# Altium PCB PCB1.PcbDoc
Units mm, origin at the board's own origin, x right, y up, seen from the top; angles counter-clockwise.
Board outline 38.3 x 26.8 mm, 2 copper layers (Top Layer, Bottom Layer); 21 components, 18 nets, 56 pads, 0 vias.
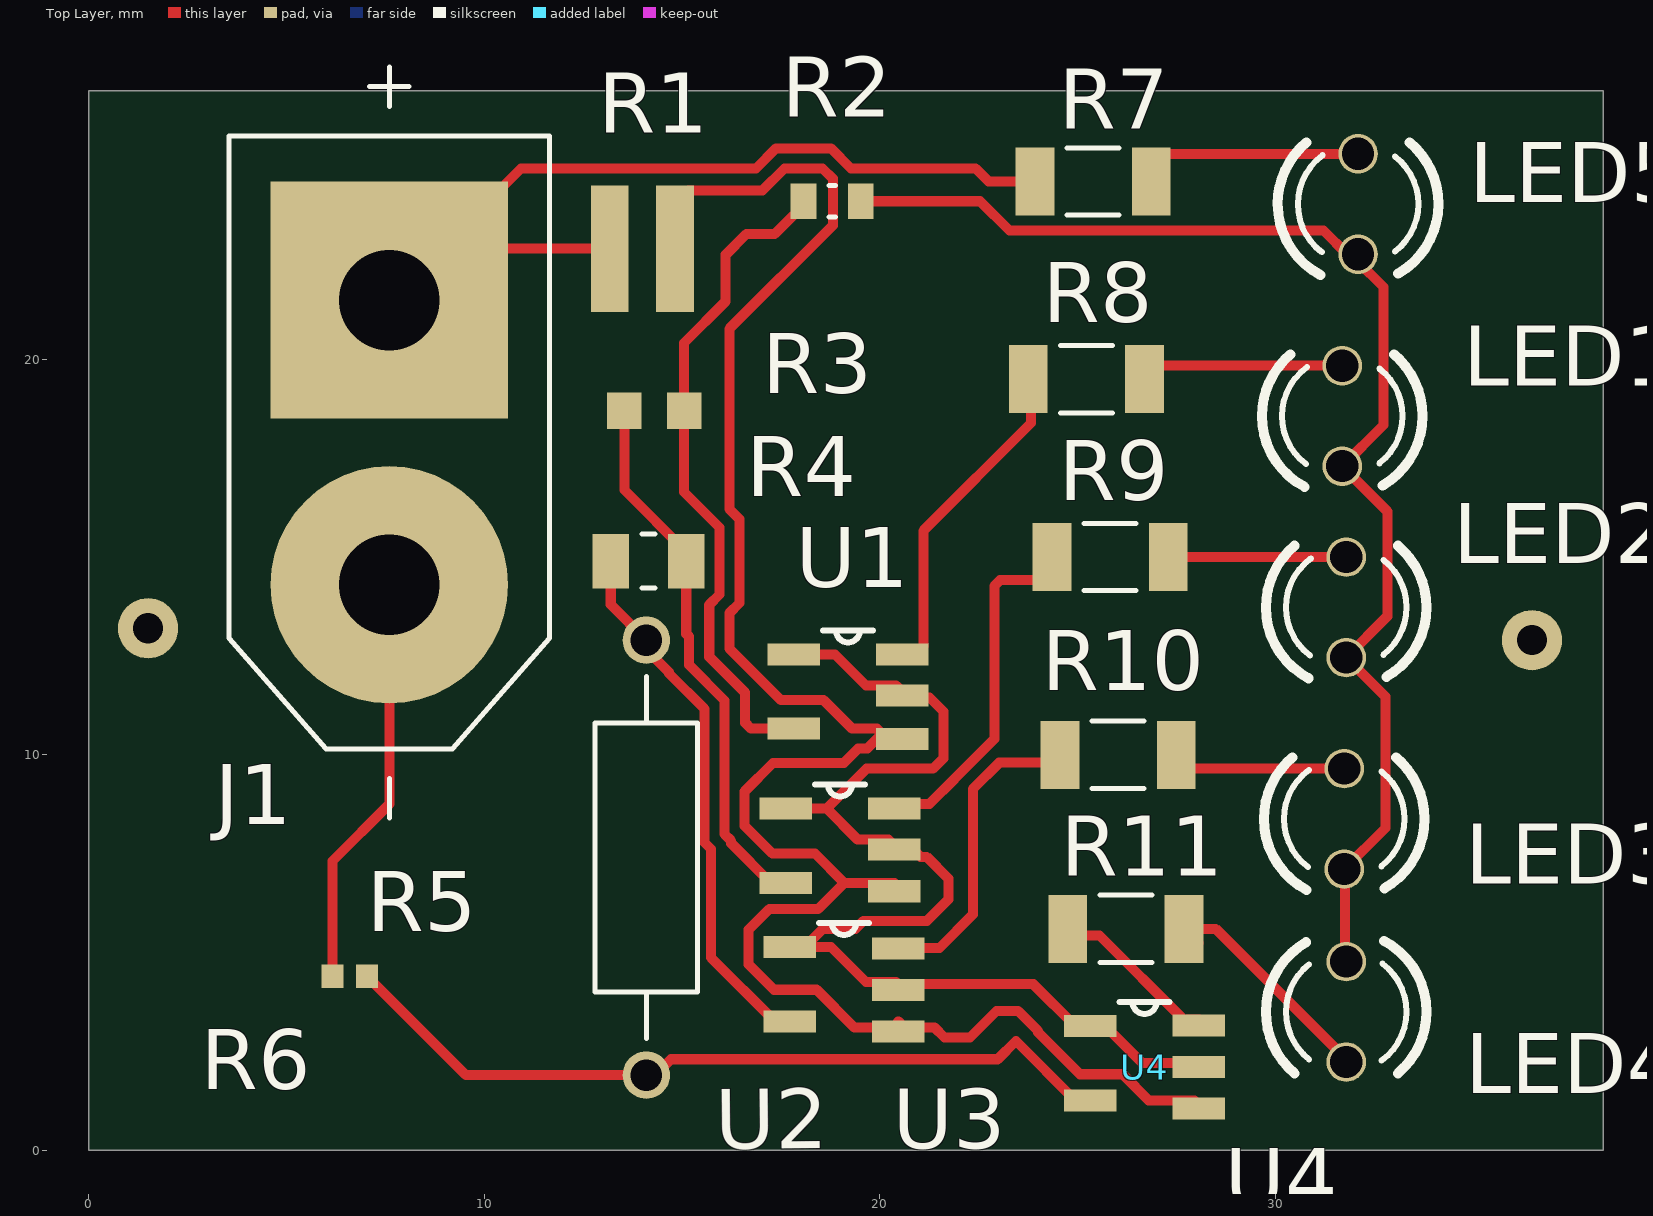
[diagram p0: Top Layer view]
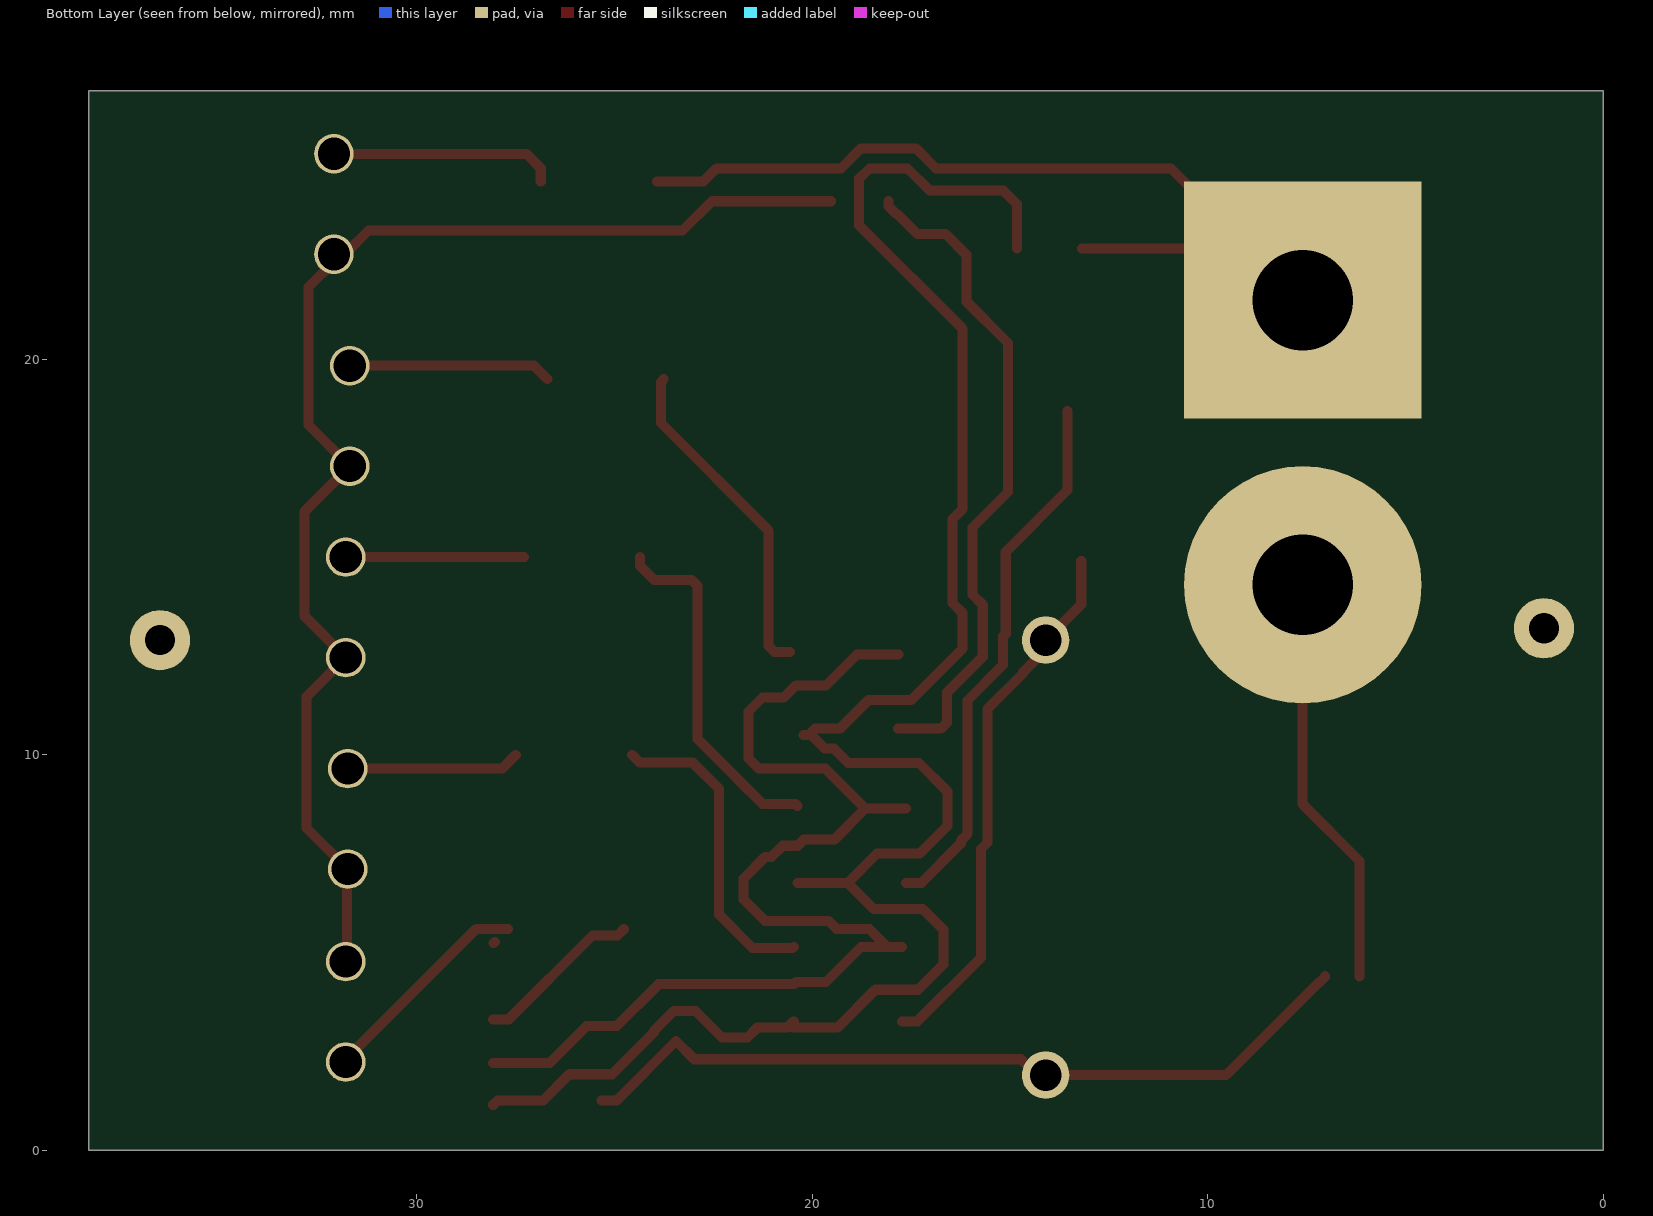
[diagram p1: Bottom Layer view, seen from below]
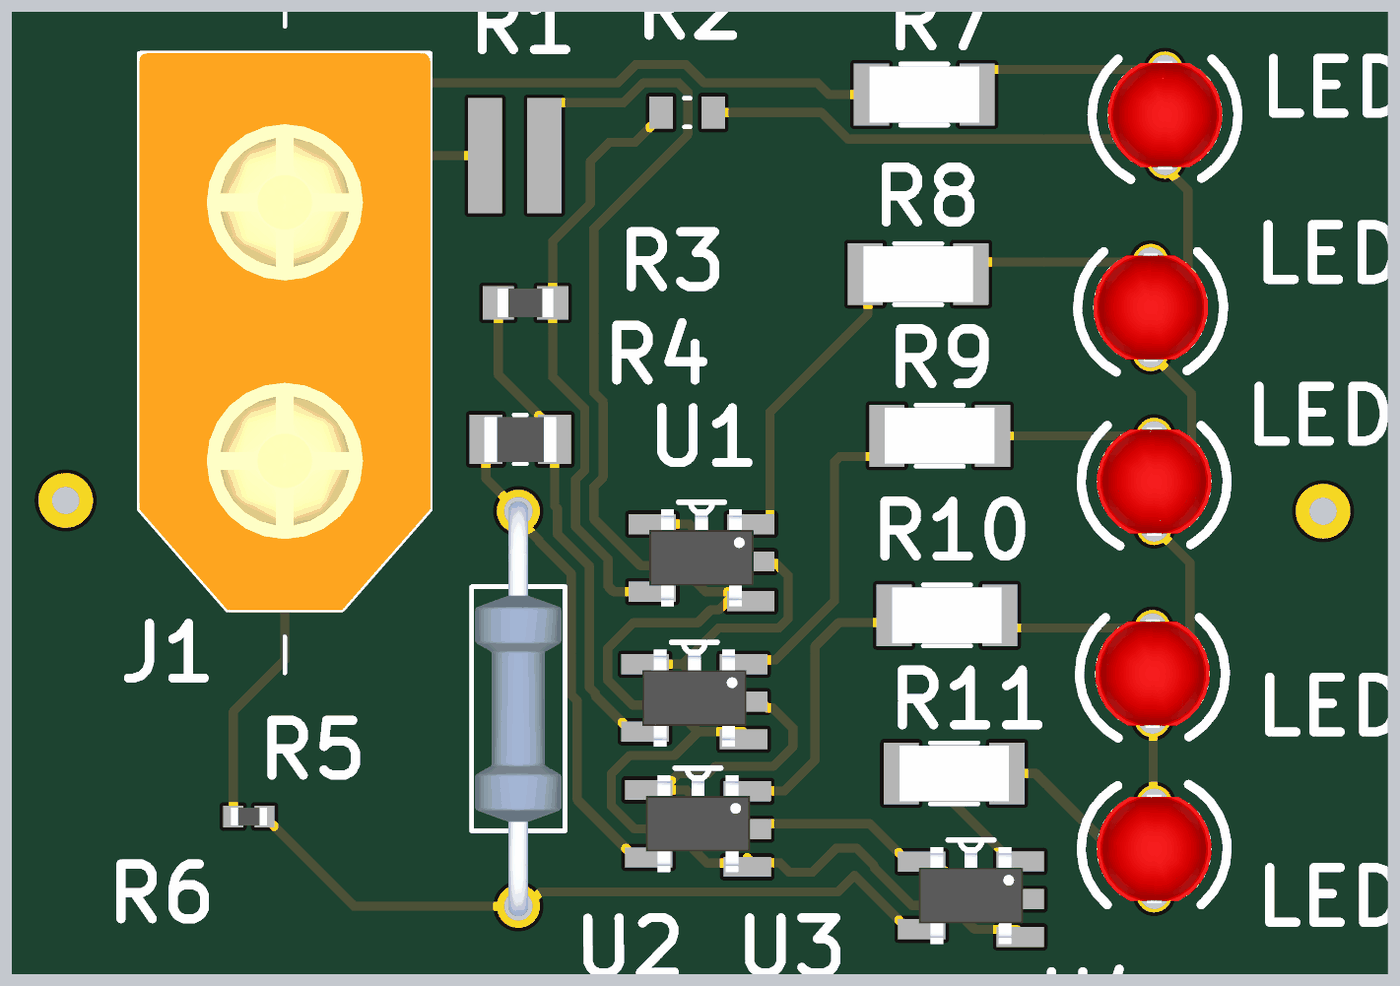
[diagram p2: 3D render of the assembled board from above, using the file's embedded part models]

## Layer stack, top to bottom
Top Solder: solder mask 0.0102, Solder Resist, Dk 3.5
Top Layer: signal copper 0.0356
Dielectric 1: dielectric 0.32, FR-4, Dk 4.8
Bottom Layer: signal copper 0.0356
Bottom Solder: solder mask 0.0102, Solder Resist, Dk 3.5

## Board outline
0,0 0,26.8 38.3,26.8 38.3,0

## Design rules (kind name [scope] priority, off if disabled: settings)
Clearance [All] p1: gap=0.254 ignorepadtopadclearanceinfootprint=FALSE
PolygonConnect [All] p1: connectstyle=Relief reliefconductorwidth=0.254 reliefentries=4 polygonreliefangle="90 Angle" airgapwidth=0.254
RoutingVias [All] p1: holewidth=0.711 width=1.27 viastyle="Through Hole" minholewidth=0.711 minwidth=1.27 maxholewidth=0.711 maxwidth=1.27
SolderMaskExpansion [All] p1: expansion=0.102 istentingtop=FALSE
SupplyNets "Schematic Supply Nets" [InNet('GND')] p1: voltage=0.000
SupplyNets "Schematic Supply Nets_1" [InNet('VCC')] p2: voltage=0.000
Width [All] p1: maxlimit=0.254 minlimit=0.254 preferedwidth=0.254
30 further rules are at their usual default settings.

## Components (designator, comment, footprint, x,y, rotation, side; value= is the part's Value field where it differs from the comment)
J1 "XT60-M" AMASS_XT60-M 7.6,17.9 r270 top (schematic designator J?)
LED1 "TLLR4400" LED3MM 31.7,18.57 r90 top
LED2 "TLLR4400" LED3MM 31.8,13.73 r90 top
LED3 "TLLR4400" LED3MM 31.75,8.38 r90 top
LED4 "TLLR4400" LED3MM 31.8,3.5 r270 top
LED5 "TLLR4400" LED3MM 32.1,23.93 r90 top
R1 "ERJB2AF432V" RES_ERJB2AF432V 14,22.8 r0 top
R2 "ERA3APB183V" RES_ERA3APB183V 18.8,24 r0 top value=18k
R3 "CPF0603B680KE1" RESC1508X55N 14.3,18.7 r0 top
R4 "RC0805FR-07536RL" RESC2012X60N 14.155,14.9 r0 top
R5 "MFR-25FRF52-576R" RESAD1100W55L680D260 14.1,7.4 r90 top
R6 "CRG0402J10K/10" RESC1005X40N 6.6,4.4 r0 top
R7 "RP73D2B1K0BTG" RESC3015X65N 25.4,24.5 r0 top
R8 "RP73D2B1K0BTG" RESC3015X65N 25.23,19.5 r0 top
R9 "RP73D2B1K0BTG" RESC3015X65N 25.83,15 r0 top
R10 "RP73D2B1K0BTG" RESC3015X65N 26.03,10 r0 top
R11 "RP73D2B1K0BTG" RESC3015X65N 26.23,5.6 r0 top
U1 "MCP6401T-E/OT" SOT95P270X145-5N#1 19.2,11.6 r180 top
U2 "MCP6401T-E/OT" SOT95P270X145-5N#2 19,7.7 r180 top
U3 "MCP6401T-E/OT" SOT95P270X145-5N#3 19.1,4.2 r180 top
U4 "MCP6401T-E/OT" SOT95P270X145-5N#4 26.7,2.2 r180 top

## Footprints (in the part's own frame and the unit in brackets; to place one, negate y for a bottom-side part, rotate by r counter-clockwise, add the part's x,y. Pads: shape width x height; smd on the part's side, far side on the other; paste and mask are expansions set on the pad)
AMASS_XT60-M [mm]
  round 6 hole 2.54: N(3.6,0)
  rect 6x6 / inner round 6 / far side rect 6x6 hole 2.54: P(-3.6,0)
  silkscreen extent -9.5,-4.05 9.5,4.05, body extent -7.75,-4.05 7.75,4.05, height 16
LED3MM [mm]
  round 1 hole 0.813: A(-1.27,0) K(1.27,0)
  silkscreen extent -1.79,-2.03 1.56,2.03, body extent -1.52,-1.59 1.52,1.59, height 6.1
RES_ERA3APB183V [mm]
  rect 0.65x0.9 smd: 1(-0.725,0) 2(0.725,0)
  silkscreen extent -0.08,-0.4 0.08,0.4
RES_ERJB2AF432V [mm]
  rect 0.95x3.2 smd: 1(-0.825,0) 2(0.825,0)
RESAD1100W55L680D260 [mm]
  round 1.2 hole 0.8: 1(-5.5,0) 2(5.5,0)
  silkscreen extent -4.58,-1.3 4.58,1.3, body extent -5.77,-1.2 5.77,1.2, height 2.4
RESC1005X40N [mm]
  rect 0.56x0.6 smd: 1(-0.435,0) 2(0.435,0)
  body extent -0.5,-0.25 0.5,0.25, height 0.37
RESC1508X55N [mm]
  rect 0.87x0.93 smd: 1(-0.755,0) 2(0.755,0)
  body extent -0.77,-0.4 0.77,0.4, height 0.55
RESC2012X60N [mm]
  rect 0.92x1.38 smd: 1(-0.955,0) 2(0.955,0)
  silkscreen extent -0.17,-0.68 0.17,0.68, body extent -1,-0.63 1,0.63, height 0.6
RESC3015X65N [mm]
  rect 0.98x1.72 smd: 1(-1.47,0) 2(1.47,0)
  silkscreen extent -0.66,-0.85 0.66,0.85, body extent -1.53,-0.77 1.53,0.77, height 0.65
SOT95P270X145-5N#1 [mil]
  rect 52x22 smd: 1(-54,-37.01) 2(-54,3.94) 3(-54,47.24) 4(54,37) 5(54,-37)
  silkscreen extent -25,-61 25,-49, body extent -57,-53 57,53, height 57
SOT95P270X145-5N#2 [mil]
  rect 52x22 smd: 1(-54,-37.01) 2(-54,3.94) 3(-54,45.28) 4(54,37) 5(54,-37)
  silkscreen extent -25,-61 25,-49, body extent -57,-53 57,53, height 57
SOT95P270X145-5N#3 [mil]
  rect 52x22 smd: 1(-54,-35.43) 2(-54,5.91) 3(-54,47.24) 4(54,37) 5(54,-37)
  silkscreen extent -25,-61 25,-49, body extent -57,-53 57,53, height 57
SOT95P270X145-5N#4 [mil]
  rect 52x22 smd: 1(-54,-37.4) 2(-54,3.94) 3(-54,45.28) 4(54,37) 5(54,-37)
  silkscreen extent -25,-61 25,-49, body extent -57,-53 57,53, height 57

## Part data
J1: "Plug; DC supply; XT60; male; PIN: 2; for cable; soldered; 30A; 500V", Package=Package, Check_prices=https://www.snapeda.com/parts/XT60-M/AMASS/view-part/?ref=eda, MF=AMASS, MP=XT60-M, SnapEDA_Link=https://www.snapeda.com/parts/XT60-M/AMASS/view-part/?ref=snap
LED1 LED2 LED3 LED4 LED5: "Red 619nm LED Indication - Discrete 1.9V Radial", Package=None, Check_prices=https://www.snapeda.com/parts/TLLR4400/Vishay+Semiconductor+Opto+Division/view-part/?ref=eda, MF=Vishay, MP=TLLR4400, SnapEDA_Link=https://www.snapeda.com/parts/TLLR4400/Vishay+Semiconductor+Opto+Division/view-part/?ref=snap
R1 R2: Package=None, Availability=Unavailable, Price=None
  R1: MP=ERJB2AF432V
  R2: MP=ERA3APB183V
R3: "680 kOhms Â±0.1% 0.063W, 1/16W Chip Resistor 0603 (1608 Metric) Thin Film", Package=0603, Power_Rating=".063 W", Resistance=750K, Tolerance=.1%, Voltage_Rating="50 V", Check_prices=https://www.snapeda.com/parts/CPF0603B680KE1/TE+Connectivity/view-part/?ref=eda, EU_RoHS_Compliance=Compliant, MF="TE Connectivity", MP=CPF0603B680KE1, SnapEDA_Link=https://www.snapeda.com/parts/CPF0603B680KE1/TE+Connectivity/view-part/?ref=snap
R4: "536 Ohms Â±1% 0.125W, 1/8W Chip Resistor 0805 (2012 Metric) Moisture Resistant Thick Film", Package="2012 Yageo", Check_prices=https://www.snapeda.com/parts/RC0805FR-07536RL/Yageo/view-part/?ref=eda, MF=Yageo, MP=RC0805FR-07536RL, SnapEDA_Link=https://www.snapeda.com/parts/RC0805FR-07536RL/Yageo/view-part/?ref=snap
R5: "576 Ohms Â±1% 0.25W, 1/4W Through Hole Resistor Axial - Metal Film", Package="RADIAL-2 YAGEO", Check_prices=https://www.snapeda.com/parts/MFR-25FRF52-576R/Yageo/view-part/?ref=eda, MF=Yageo, MP=MFR-25FRF52-576R, SnapEDA_Link=https://www.snapeda.com/parts/MFR-25FRF52-576R/Yageo/view-part/?ref=snap
R6: "CRG0402 chip resistor,10K 5% 0.063W", Package=0402, Power_Rating=".063 W", Resistance=10K, Tolerance=5%, Voltage_Rating="50 V", Check_prices=https://www.snapeda.com/parts/CRG0402J10K/10/TE+Connectivity+Passive+Product/view-part/?ref=eda, EU_RoHS_Compliance="Compliant with Exemptions", MF="TE Connectivity", MP=CRG0402J10K/10, SnapEDA_Link=https://www.snapeda.com/parts/CRG0402J10K/10/TE+Connectivity+Passive+Product/view-part/?ref=snap
R7 R8 R9 R10 R11: "Res Thin Film 1206 1K Ohm 0.1% 0.25W(1/4W) Â±15ppm/C Epoxy Pad SMD Medical T/R", Package=1206, Power_Rating=".25 W", Resistance=1K, Tolerance=.1%, Voltage_Rating="200 V", Check_prices=https://www.snapeda.com/parts/RP73D2B1K0BTG/TE+Connectivity/view-part/?ref=eda, EU_RoHS_Compliance=Compliant, MF="TE Connectivity", MP=RP73D2B1K0BTG, SnapEDA_Link=https://www.snapeda.com/parts/RP73D2B1K0BTG/TE+Connectivity/view-part/?ref=snap
U1 U2 U3 U4: "General Purpose Amplifier 1 Circuit Rail-to-Rail SOT-23-5", Package="SOT-23-5 Microchip", Check_prices=https://www.snapeda.com/parts/MCP6401T-E/OT/Microchip/view-part/345712/?ref=eda, Digi-Key_Part_Number=MCP6401T-E/OTCT-ND, MF=Microchip, MP=MCP6401T-E/OT, SnapEDA_Link=https://www.snapeda.com/parts/MCP6401T-E/OT/Microchip/view-part/345712/?ref=snap

## Free pads (board coordinates)
  round 1.524 hole 0.762: 3(1.5,13.2) 4(36.5,12.9)

## Nets (pads, with @x,y where several pads share a name; then routed paths per layer and width w, separated by ;. In a path a pad name is that pad's centre, name@x,y a point inside that pad or via, vN(x,y) a via of type N, cw(c..) or ccw(c..) an arc to the next point about the centre after c; other vN are vias at no path point)
GND: U1.2 U1.5 U2.2 U2.5 U3.2 U3.5 U4.2 U4.5 | length 30.1
  Top Layer w0.254: U2.5 18.66,8.64 ; U3.5 U3.5@18.109,5.14 ; U1.5 18.87,12.54 19.657,11.752 20.419,11.752 20.724,11.448 21.263,11.448 21.613,11.097 21.613,9.913 21.35,9.65 19.67,9.65 18.66,8.64 ; U4.2@28.072,2.2 26.649,2.2 25.709,3.14 U4.5 24.947,3.14 23.887,4.2 20.472,4.2 20.419,4.252 19.657,4.252 18.77,5.14 U3.5@18.109,5.14 ; U3.5@18.109,5.14 18.561,5.592 19.385,5.592 19.593,5.8 21.2,5.8 21.745,6.345 21.745,6.865 21.19,7.421 21.032,7.421 20.753,7.7 20.372,7.7 20.219,7.852 19.448,7.852 18.66,8.64
NetJ?_N: J1.N R6.1 | length 10.5
  Top Layer w0.254: R6.1 6.165,7.315 7.6,8.75 J1.N
NetJ?_P: J1.P R1.1 R7.1 | length 22.5
  Top Layer w0.254: J1.P J1.P@8.9,22.8 ; R1.1 J1.P@8.9,22.8 ; R7.1 22.76,24.5 22.429,24.831 19.276,24.831 18.768,25.339 17.382,25.339 16.874,24.831 10.931,24.831 J1.P@8.9,22.8
NetLED1_K: LED1.K R8.2 | length 5.1
  Top Layer w0.254: R8.2 27.04,19.84 LED1.K
NetLED2_K: LED2.K R9.2 | length 4.5
  Top Layer w0.254: R9.2 LED2.K
NetLED3_K: LED3.K R10.2 | length 4.4
  Top Layer w0.254: R10.2 27.85,9.65 LED3.K
NetLED4_K: LED4.K R11.2 | length 5.6
  Top Layer w0.254: R11.2 28.5,5.6 31.8,2.3 LED4.K ; R11.2@28.03,5.27 R11.2@28.063,5.237
NetLED5_K: LED5.K R7.2 | length 5.7
  Top Layer w0.254: R7.2 26.87,24.837 27.233,25.2 LED5.K
NetR1_2: R1.2 U1.3 U2.3 U3.3 U4.3 | length 50.3
  Top Layer w0.254: R1.2 14.825,23.925 15.173,24.273 17.034,24.273 17.592,24.831 18.558,24.831 18.819,24.57 18.819,23.392 16.2,20.773 16.2,16.217 16.459,15.958 16.459,13.842 16.2,13.583 16.2,12.69 17.508,11.381 18.586,11.381 19.307,10.66 19.93,10.66 20.088,10.503 U1.3@20.224,10.503 ; U1.3@20.061,10.53 19.688,10.158 19.46,10.158 19.094,9.792 17.302,9.792 16.587,9.077 16.587,8.203 17.288,7.502 18.365,7.502 19.107,6.76 ; U2.3@20.372,6.76 19.107,6.76 ; U3.3@20.472,3.1 19.367,3.1 18.41,4.058 17.332,4.058 16.687,4.703 16.687,5.577 17.21,6.1 18.447,6.1 19.107,6.76 ; U3.3@20.472,3.26 20.624,3.108 21.384,3.108 21.643,2.849 22.284,2.849 22.956,3.521 23.505,3.521 24.008,3.018 24.008,2.982 25.069,1.921 26.147,1.921 26.807,1.26 27.961,1.26 U4.3@28.072,1.15
NetR2_1: R2.1 R3.2 U1.4 | length 17
  Top Layer w0.254: U1.4 16.749,10.66 16.6,10.809 16.6,11.571 15.692,12.479 15.692,13.793 15.951,14.052 15.951,15.748 15.055,16.644 R3.2 15.055,20.416 16.107,21.469 16.107,22.648 16.628,23.168 17.347,23.168 17.855,23.677 17.877,23.677 18.075,23.875 R2.1
NetR3_1: R3.1 R4.2 U2.4 | length 13.9
  Top Layer w0.254: R3.1 13.545,16.695 15.11,15.13 15.11,13.061 15.184,12.987 15.184,12.269 16.079,11.374 16.079,7.992 16.246,7.825 16.246,7.762 17.247,6.76 U2.4
NetR4_1: R4.1 R5.2 U3.4 | length 13.7
  Top Layer w0.254: R4.1 13.2,13.8 R5.2 14.1,12.665 14.676,12.089 14.676,12.058 15.571,11.163 15.571,7.782 15.738,7.615 15.738,4.87 17.347,3.26 U3.4
NetR5_1: R5.1 R6.2 U4.4 | length 20.3
  Top Layer w0.254: R6.2 7.035,4.38 7.188,4.227 7.208,4.227 9.535,1.9 14.322,1.9 14.722,2.3 22.987,2.3 23.447,2.76 24.947,1.26 U4.4
NetR8_1: R8.1 U1.1 | length 8.5
  Top Layer w0.254: U1.1@20.572,12.6 20.953,12.6 21.105,12.752 21.105,15.664 23.83,18.389 23.83,19.43 R8.1
NetR9_1: R9.1 U2.1 | length 9
  Top Layer w0.254: U2.1@20.372,8.7 20.431,8.76 21.264,8.76 21.9,9.396 21.9,9.4 22.9,10.4 22.9,14.272 23.049,14.421 23.997,14.421 24.36,14.784 R9.1
NetR10_1: R10.1 U3.1 | length 8
  Top Layer w0.254: U3.1@20.472,5.14 20.498,5.113 21.513,5.113 22.358,5.958 22.358,9.135 23.025,9.802 24.362,9.802 R10.1
NetR11_1: R11.1 U4.1 | length 4.3
  Top Layer w0.254: R11.1 24.929,5.431 25.56,5.431 27.691,3.3 U4.1@28.072,3.3
VCC: LED1.A LED2.A LED3.A LED4.A LED5.A R2.2 | length 33.5
  Top Layer w0.254: R2.2 22.541,24 23.282,23.259 31.226,23.259 31.825,22.66 LED5.A 32.1,22.47 32.741,21.829 32.741,18.341 LED1.A 32.841,16.159 32.841,13.501 LED2.A 32.791,11.469 32.791,8.151 LED3.A 31.775,7.085 31.775,4.795 LED4.A

## Silkscreen, mask and mechanical layers (free items; w line width, h text height)
Mechanical 1:
  the board outline again, w0.254